# Altium PCB Project.PcbDoc (part 3 of 5)
Units mm, origin at the board's own origin, x right, y up, seen from the top; angles counter-clockwise.
Board outline 95 x 65 mm, 6 copper layers (Top Layer, L2 - GND, L3 - PWR, L4 - Sig, L5 - GND, Bottom Layer), stack 1.538 mm thick; 346 components, 317 nets, 1244 pads, 645 vias.
Unrouted connection lines stored in the file: 109.
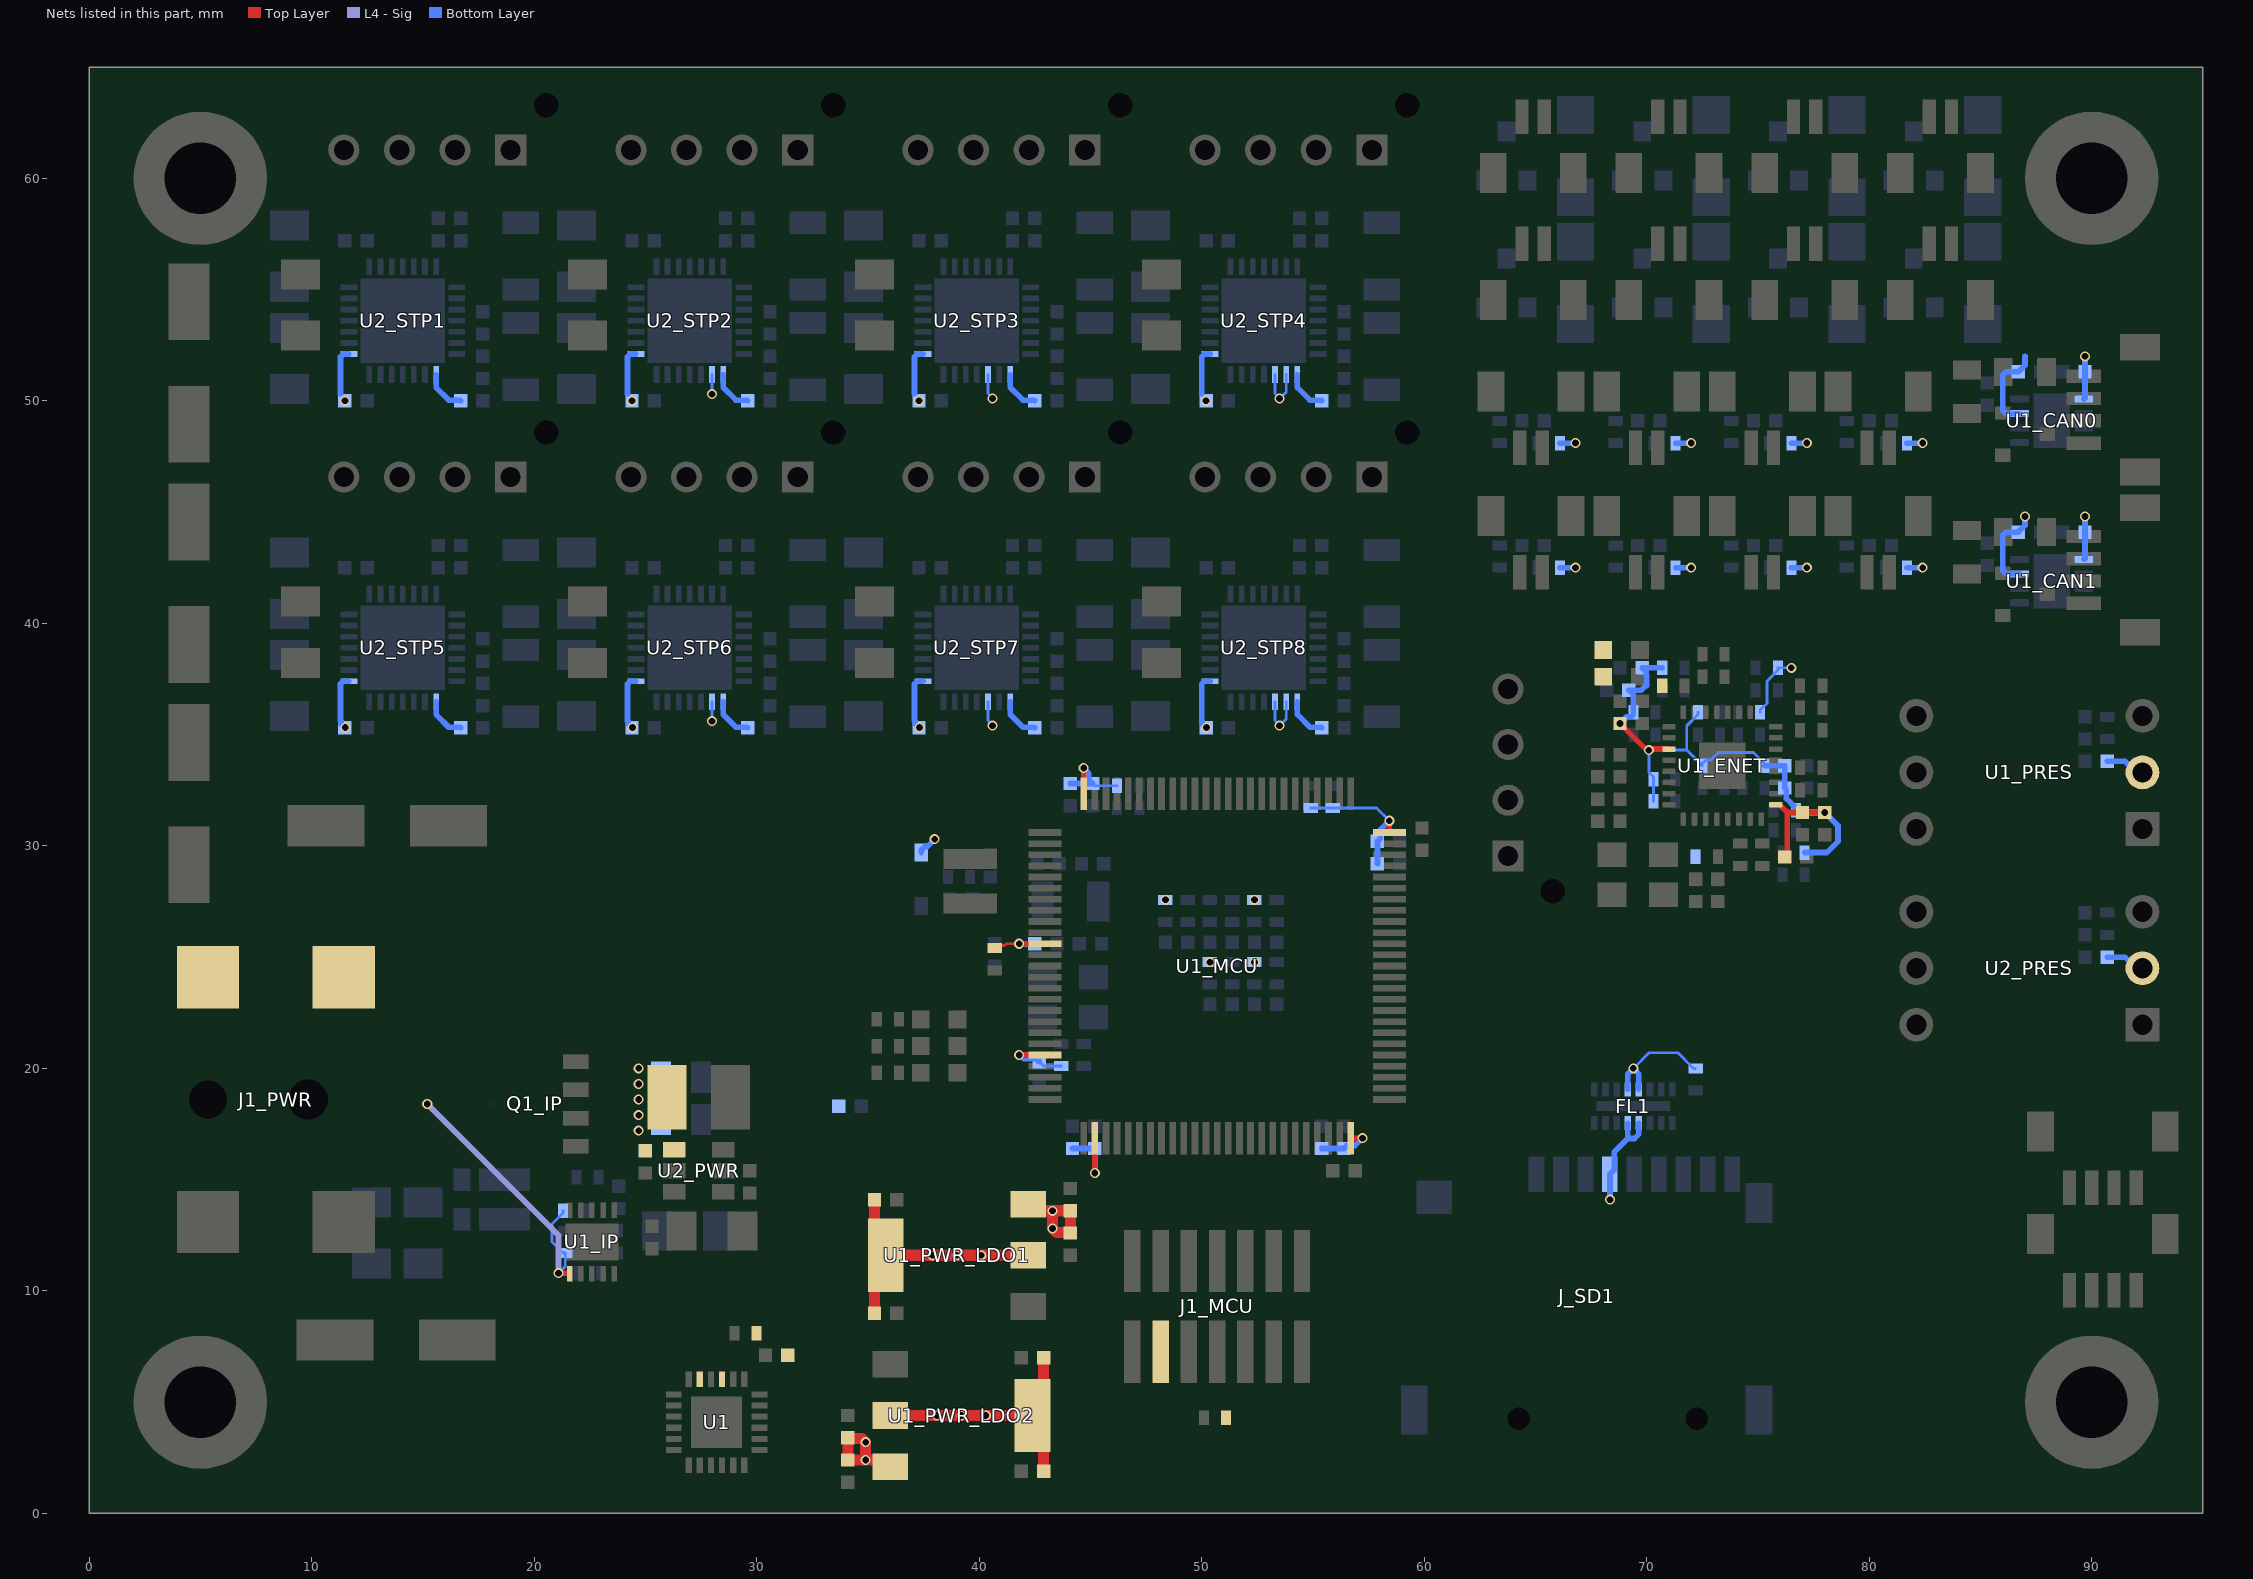
[diagram p5: the nets of this part, all layers, seen from the top]

## Via types
v1: diameter 0.45, hole 0.3, Top Layer to Bottom Layer, tented both sides, 633 vias
v2: diameter 0.55, hole 0.4, Top Layer to Bottom Layer, tented both sides, 12 vias

## Nets (pads, with @x,y where several pads share a name; then routed paths per layer and width w, separated by ;. In a path a pad name is that pad's centre, name@x,y a point inside that pad or via, vN(x,y) a via of type N, cw(c..) or ccw(c..) an arc to the next point about the centre after c; other vN are vias at no path point) (continued)
24V_IN: (continued)
  Top Layer w0.254: v1(21.1,10.8) 21.112,10.787 21.598,10.787 21.6,10.786 U1_IP.1@21.6,10.775
  L4 - Sig w0.254: v1(15.2,18.4) 21.1,12.5 v1(21.1,10.8)
  Bottom Layer w0.127: v1(21.1,10.8) 21.4,11.1 R2_IP.2@21.4,11.7 21.3,11.7 20.8,12.2 20.8,13 21.3,13.5 R3_IP.2@21.3,13.6
  other v1: 48.375,27.575